# Altium PCB PCB1.PcbDoc
Units mm, origin at the board's own origin, x right, y up, seen from the top; angles counter-clockwise.
Board outline 50 x 50 mm, 2 copper layers (Top Layer, Bottom Layer); 9 components, 13 nets, 59 pads, 0 vias.
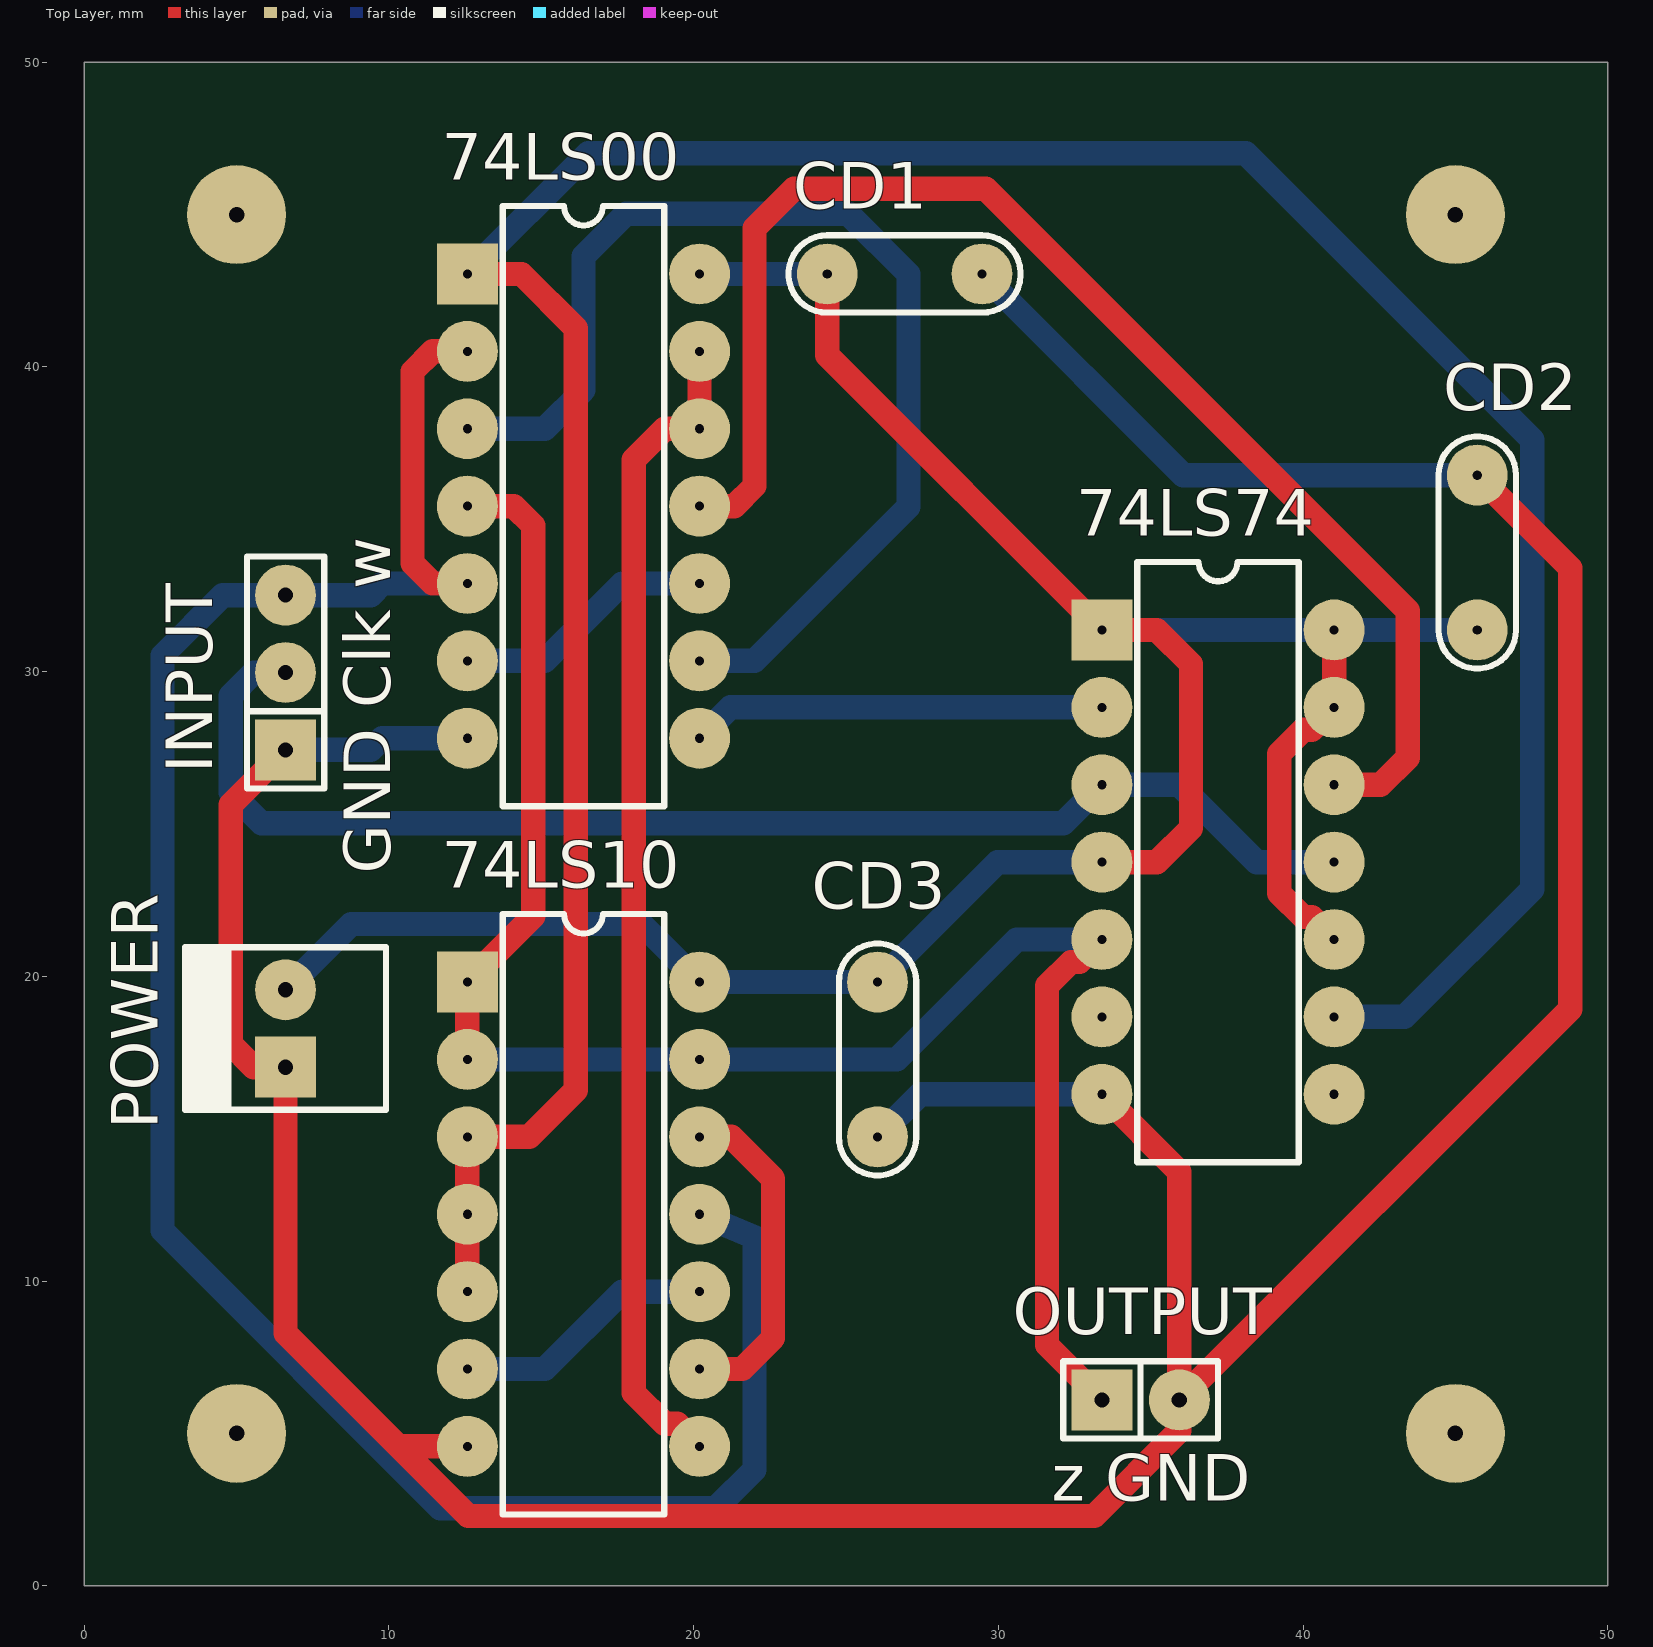
[diagram p0: Top Layer view]
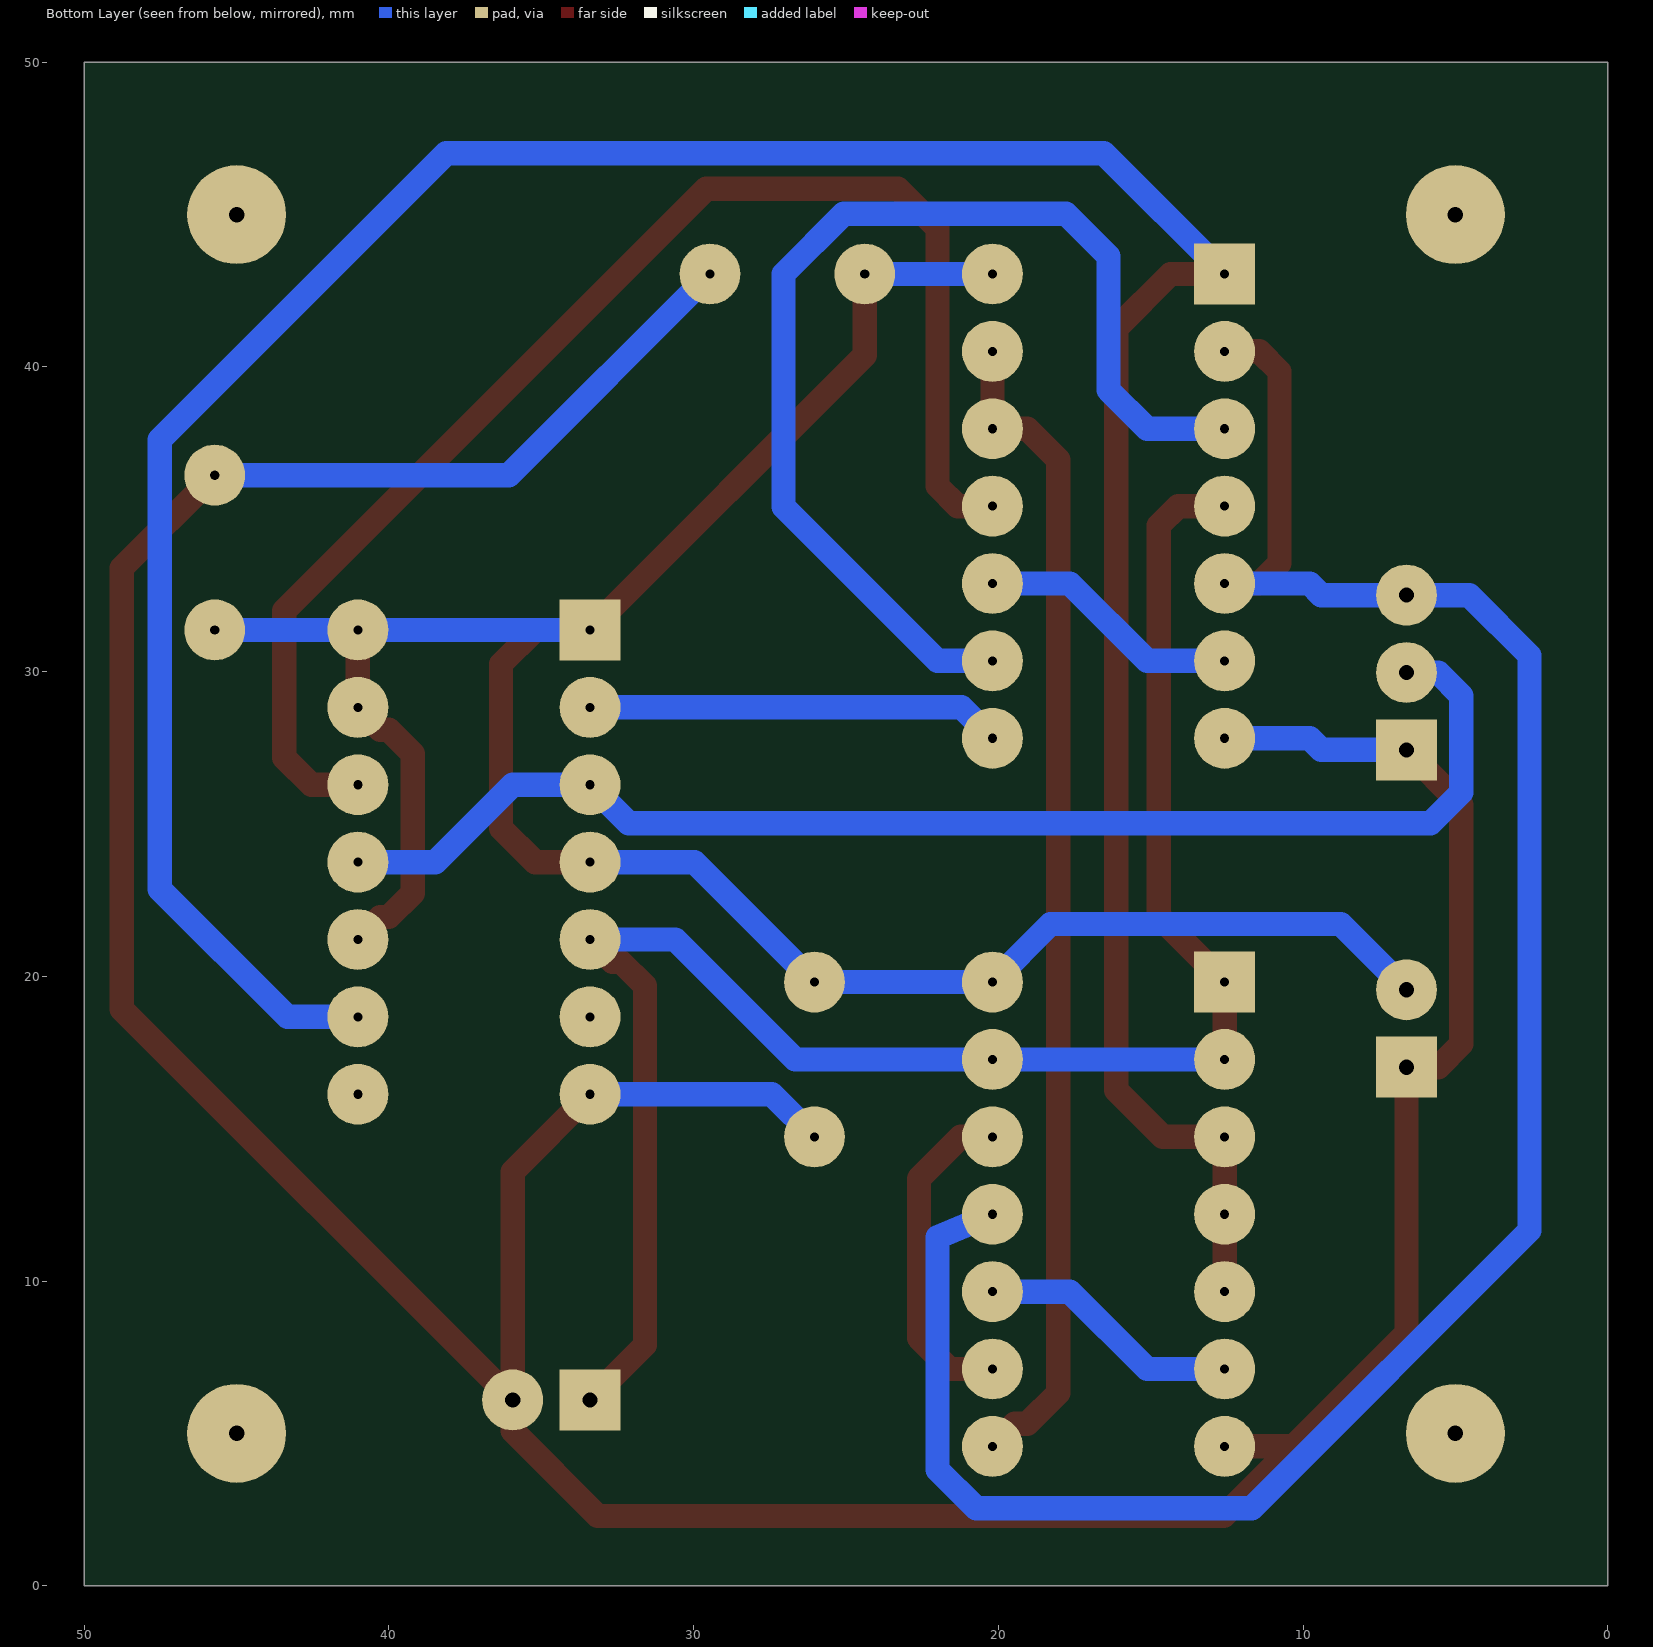
[diagram p1: Bottom Layer view, seen from below]
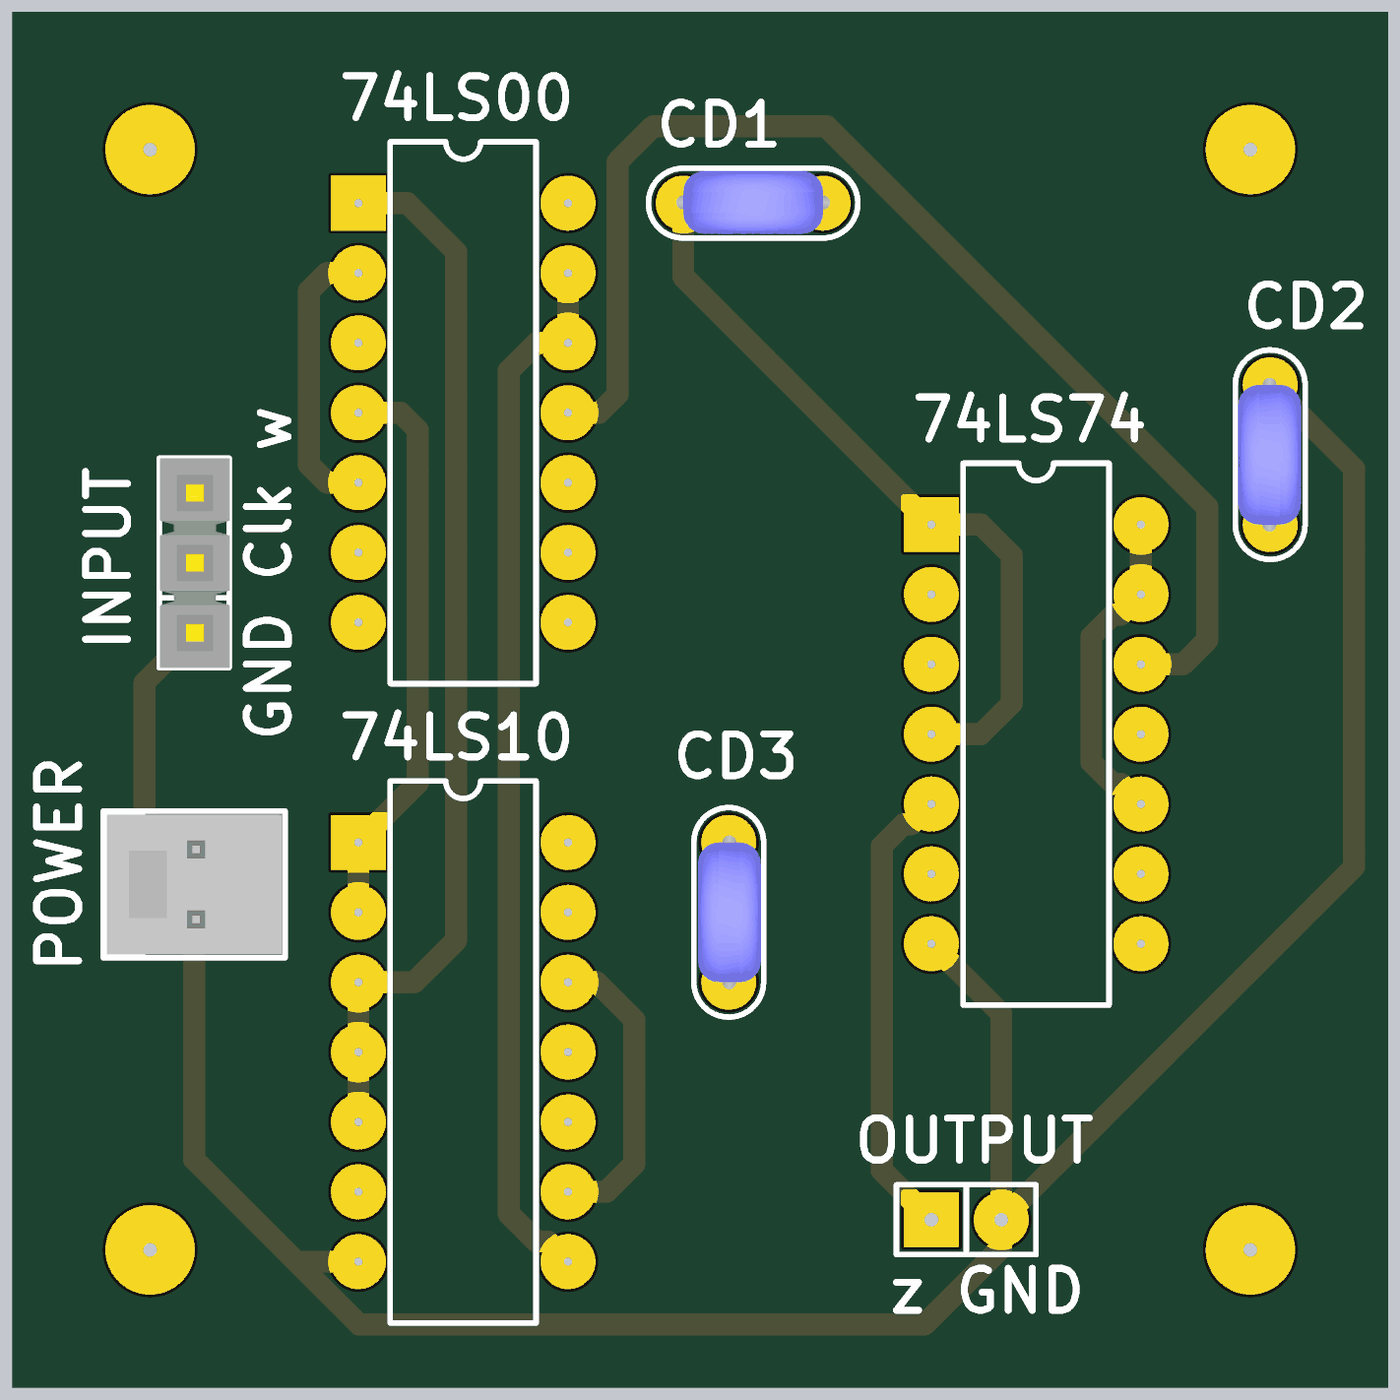
[diagram p2: 3D render of the assembled board from above, using the file's embedded part models]

## Layer stack, top to bottom
Top Solder: solder mask 0.0102, Solder Resist, Dk 3.5
Top Layer: signal copper 0.0356
Dielectric 1: dielectric 0.32, FR-4, Dk 4.8
Bottom Layer: signal copper 0.0356
Bottom Solder: solder mask 0.0102, Solder Resist, Dk 3.5

## Board outline
0,0 50,0 50,50 0,50

## Design rules (kind name [scope] priority, off if disabled: settings)
Clearance [All] p1: gap=0.4 ignorepadtopadclearanceinfootprint=FALSE
PolygonConnect [All] p1: connectstyle=Relief reliefconductorwidth=0.254 reliefentries=4 polygonreliefangle="90 Angle" airgapwidth=0.254
RoutingVias [All] p1: holewidth=0.3 width=2 viastyle="Through Hole" minholewidth=0.3 minwidth=1.5 maxholewidth=0.5 maxwidth=2
SolderMaskExpansion [All] p1: expansion=0.102
Width [All] p1: maxlimit=0.9 minlimit=0.6 preferedwidth=0.8
30 further rules are at their usual default settings.

## Components (designator, comment, footprint, x,y, rotation, side; value= is the part's Value field where it differs from the comment)
74LS00 "SN74ALS00AN" N014 16.383,35.433 r270 top
74LS10 "SN74ALS10AN" N014 16.383,12.192 r270 top
74LS74 "SN74LS74AN" N014D 37.211,23.749 r270 top
CD1 "CAP" CAP200 26.924,43.053 r180 top
CD2 "CAP" CAP200 45.72,33.909 r270 top
CD3 "CAP" CAP200 26.035,17.272 r90 top
INPUT "CON3" SIP3 6.604,29.972 r90 top
OUTPUT "CON2" SIP2 34.671,6.096 r0 top
POWER "MOLEX2" MOLEX2 6.604,17.018 r90 top

## Footprints (in the part's own frame and the unit in brackets; to place one, negate y for a bottom-side part, rotate by r counter-clockwise, add the part's x,y. Pads: shape width x height; smd on the part's side, far side on the other; paste and mask are expansions set on the pad)
CAP200 [mm]
  round 2 hole 0.3: 1(-2.54,0) 2(2.54,0)
  silkscreen extent -3.81,-1.27 3.81,1.27, body extent -2.79,-1.17 2.79,1.12, height 6.24
MOLEX2 [mm]
  rect 2x2 hole 0.5: 1(0,0)
  round 2 hole 0.5: 2(2.54,0)
  silkscreen extent -1.4,-3.3 3.94,3.3, body extent -1.27,-3.17 3.81,3.18, height 10.74
N014 [mm] "DIP; 14 Leads; Row Spacing 7.62 mm; Pitch 2.54 mm"
  rect 2x2 hole 0.3: 1(-7.62,-3.81)
  round 2 hole 0.3: 2(-5.08,-3.81) 3(-2.54,-3.81) 4(0,-3.81) 5(2.54,-3.81) 6(5.08,-3.81) 7(7.62,-3.81) 8(7.62,3.81) 9(5.08,3.81) 10(2.54,3.81) 11(0,3.81) 12(-2.54,3.81) 13(-5.08,3.81) 14(-7.62,3.81)
  silkscreen extent -9.85,-2.65 9.85,2.65
N014D [mm] "DIP; 14 Leads; Row Spacing 7.62 mm; Pitch 2.54 mm"
  rect 2x2 hole 0.3: 1(-7.62,-3.81)
  round 2 hole 0.3: 2(-5.08,-3.81) 3(-2.54,-3.81) 4(0,-3.81) 5(2.54,-3.81) 6(5.08,-3.81) 7(7.62,-3.81) 8(7.62,3.81) 9(5.08,3.81) 10(2.54,3.81) 11(0,3.81) 12(-2.54,3.81) 13(-5.08,3.81) 14(-7.62,3.81)
  silkscreen extent -9.85,-2.65 9.85,2.65
SIP2 [mm]
  rect 2x2 hole 0.5: 1(-1.27,0)
  round 2 hole 0.5: 2(1.27,0)
  silkscreen extent -2.54,-1.27 2.54,1.27
SIP3 [mm]
  rect 2x2 hole 0.5: 1(-2.54,0)
  round 2 hole 0.5: 2(0,0) 3(2.54,0)
  silkscreen extent -3.81,-1.27 3.81,1.27, body extent -3.81,-1.3 3.81,1.24, height 8.38

## Part data
74LS00: "Quadruple 2-Input Positive-NAND Gate", ComponentLink1Description="Manufacturer Link", ComponentLink1URL=http://www.ti.com/, ComponentLink2Description=Datasheet, ComponentLink2URL=http://www-s.ti.com/sc/ds/sn54as00.pdf, ComponentLink3Description="Packaging Specification", ComponentLink3URL=http://focus.ti.com/lit/ml/mpdi002c/mpdi002c.pdf, DatasheetVersion=Dec-1994, LatestRevisionDate=04-Mar-2005, LatestRevisionNote="Stylized 3D Model Added.", PackageDescription="DIP; 14 Leads; Row Spacing 7.62 mm; Pitch 2.54 mm", PackageReference=N014, PackageVersion=Oct-1995, Published=8-Jun-2000, Publisher="Altium Limited"
74LS10: "Triple 3-Input Positive-NAND Gate", ComponentLink1Description="Manufacturer Link", ComponentLink1URL=http://www.ti.com/, ComponentLink2Description=Datasheet, ComponentLink2URL=http://www-s.ti.com/sc/ds/sn54as10.pdf, ComponentLink3Description="Packaging Specification", ComponentLink3URL=http://focus.ti.com/lit/ml/mpdi002c/mpdi002c.pdf, DatasheetVersion=Dec-1994, LatestRevisionDate=04-Mar-2005, LatestRevisionNote="Stylized 3D Model Added.", PackageDescription="DIP; 14 Leads; Row Spacing 7.62 mm; Pitch 2.54 mm", PackageReference=N014, PackageVersion=Oct-1995, Published=8-Jun-2000, Publisher="Altium Limited"
74LS74: "Dual D-Type Positive-Edge-Triggered Flip-Flop with Preset and Clear", ComponentLink1Description="Manufacturer Link", ComponentLink1URL=http://www.ti.com/, ComponentLink2Description=Datasheet, ComponentLink2URL=http://www-s.ti.com/sc/ds/sn74ls74a.pdf, DatasheetVersion=Mar-1988, LatestRevisionDate=04-Mar-2005, LatestRevisionNote="Stylized 3D Model Added.", PackageDescription="DIP; 14 Leads; Row Spacing 7.62 mm; Pitch 2.54 mm", PackageReference=N014D, PackageVersion=Oct-1995, Published=8-Jun-2000, Publisher="Altium Limited"

## Free pads (board coordinates)
  round 3.25 hole 0.5: 67(5,5) 68(45,5) 69(5,45) 70(45,45)

## Nets (pads, with @x,y where several pads share a name; then routed paths per layer and width w, separated by ;. In a path a pad name is that pad's centre, name@x,y a point inside that pad or via, vN(x,y) a via of type N, cw(c..) or ccw(c..) an arc to the next point about the centre after c; other vN are vias at no path point)
Clk: 74LS74.3 74LS74.11 INPUT.2 | length 43.5
  Bottom Layer w0.8: INPUT.2 5.563,29.972 4.801,29.21 4.801,26.035 5.817,25.019 32.125,25.019 33.395,26.289 74LS74.3 35.941,26.289 38.481,23.749 74LS74.11
D0: 74LS00.11 74LS74.12 | length 45.9
  Top Layer w0.8: 74LS00.11 21.336,35.433 21.996,36.093 21.996,44.552 23.292,45.847 29.591,45.847 43.434,32.004 43.434,27.178 42.545,26.289 74LS74.12
D1: 74LS00.8 74LS74.2 | length 13.6
  Bottom Layer w0.8: 74LS00.8 21.209,28.829 74LS74.2
GND: 74LS00.7 74LS10.7 74LS74.7 CD1.1 CD2.1 CD3.1 INPUT.1 OUTPUT.2 POWER.1 | length 138.6
  Top Layer w0.8: INPUT.1 4.801,25.629 4.801,17.78 5.563,17.018 POWER.1 6.604,8.28 10.312,4.572 ; 74LS10.7 10.312,4.572 ; 74LS74.7 35.941,13.589 OUTPUT.2 ; CD2.1 48.768,33.401 48.768,18.923 OUTPUT.2 ; 10.312,4.572 12.598,2.286 33.147,2.286 35.941,5.08 OUTPUT.2
  Bottom Layer w0.8: INPUT.1 9.398,27.432 9.779,27.813 74LS00.7 ; CD3.1 27.432,16.129 74LS74.7 ; CD1.1 36.068,36.449 CD2.1
Net74LS00_3: 74LS00.3 74LS00.9 | length 37.4
  Bottom Layer w0.8: 74LS00.3 15.113,37.973 16.383,39.243 16.383,43.637 17.78,45.034 25.07,45.034 27.051,43.053 27.051,35.408 21.996,30.353 74LS00.9
Net74LS00_6: 74LS00.6 74LS00.10 | length 8.7
  Bottom Layer w0.8: 74LS00.6 15.113,30.353 17.653,32.893 74LS00.10
Net74LS00_12: 74LS00.12 74LS00.13 74LS10.8 | length 38.6
  Top Layer w0.8: 74LS10.8 19.456,5.309 19.05,5.309 18.034,6.325 18.034,36.957 19.05,37.973 74LS00.12 74LS00.13
Net74LS10_6: 74LS10.6 74LS10.10 | length 8.7
  Bottom Layer w0.8: 74LS10.6 15.113,7.112 17.653,9.652 74LS10.10
Net74LS10_9: 74LS10.9 74LS10.12 | length 11
  Top Layer w0.8: 74LS10.9 21.59,7.112 22.606,8.128 22.606,13.36 21.234,14.732 74LS10.12
VCC: 74LS00.14 74LS10.14 74LS74.1 74LS74.4 74LS74.10 74LS74.13 74LS74.14 CD1.2 CD2.2 CD3.2 POWER.2 | length 86.2
  Top Layer w0.8: CD1.2 24.384,40.386 74LS74.1 35.204,31.369 36.322,30.251 36.322,24.867 35.204,23.749 74LS74.4 ; 74LS74.10 40.284,21.946 40.005,21.946 39.218,22.733 39.218,27.305 40.005,28.092 40.284,28.092 74LS74.13 74LS74.14
  Bottom Layer w0.8: POWER.2 8.763,21.717 18.288,21.717 74LS10.14 CD3.2 29.972,23.749 74LS74.4 ; 74LS00.14 CD1.2 ; 74LS74.1 74LS74.14 CD2.2
w: 74LS00.2 74LS00.5 74LS10.11 INPUT.3 | length 73.6
  Top Layer w0.8: 74LS00.5 11.43,32.893 10.77,33.553 10.77,39.853 11.43,40.513 74LS00.2
  Bottom Layer w0.8: 74LS00.5 9.779,32.893 9.398,32.512 INPUT.3 4.547,32.512 2.565,30.531 2.565,11.659 11.684,2.54 20.726,2.54 21.996,3.81 21.996,11.43 74LS10.11
y0: 74LS00.1 74LS10.3 74LS10.4 74LS10.5 74LS74.9 | length 102.1
  Top Layer w0.8: 74LS10.5 74LS10.4 74LS10.3 14.605,14.732 16.129,16.256 16.129,41.275 14.351,43.053 74LS00.1
  Bottom Layer w0.8: 74LS00.1 16.535,47.015 38.125,47.015 47.523,37.617 47.523,22.86 43.332,18.669 74LS74.9
y1: 74LS00.4 74LS10.1 74LS10.2 74LS10.13 74LS74.5 OUTPUT.1 | length 60.1
  Top Layer w0.8: 74LS10.2 74LS10.1 14.732,21.971 14.732,34.798 14.097,35.433 74LS00.4 ; OUTPUT.1 31.598,7.899 31.598,19.685 32.385,20.472 32.664,20.472 74LS74.5
  Bottom Layer w0.8: 74LS10.2 74LS10.13 26.67,17.272 30.607,21.209 74LS74.5
pads on no net: 74LS74.6 74LS74.8

## Silkscreen, mask and mechanical layers (free items; w line width, h text height)
Top Overlay:
  text "GND Clk w" at 10.033,23.368 h1.52 r90
  text "z GND" at 31.75,2.794 h1.52